# Altium PCB PCB1.PcbDoc (part 1 of 2)
Units mm, origin at the board's own origin, x right, y up, seen from the top; angles counter-clockwise.
Board outline 103.5 x 62.7 mm, 4 copper layers (Top Layer, Int1 (GND), Int2 (PWR), Bottom Layer), stack 1.369 mm thick; 71 components, 120 nets, 440 pads, 282 vias.
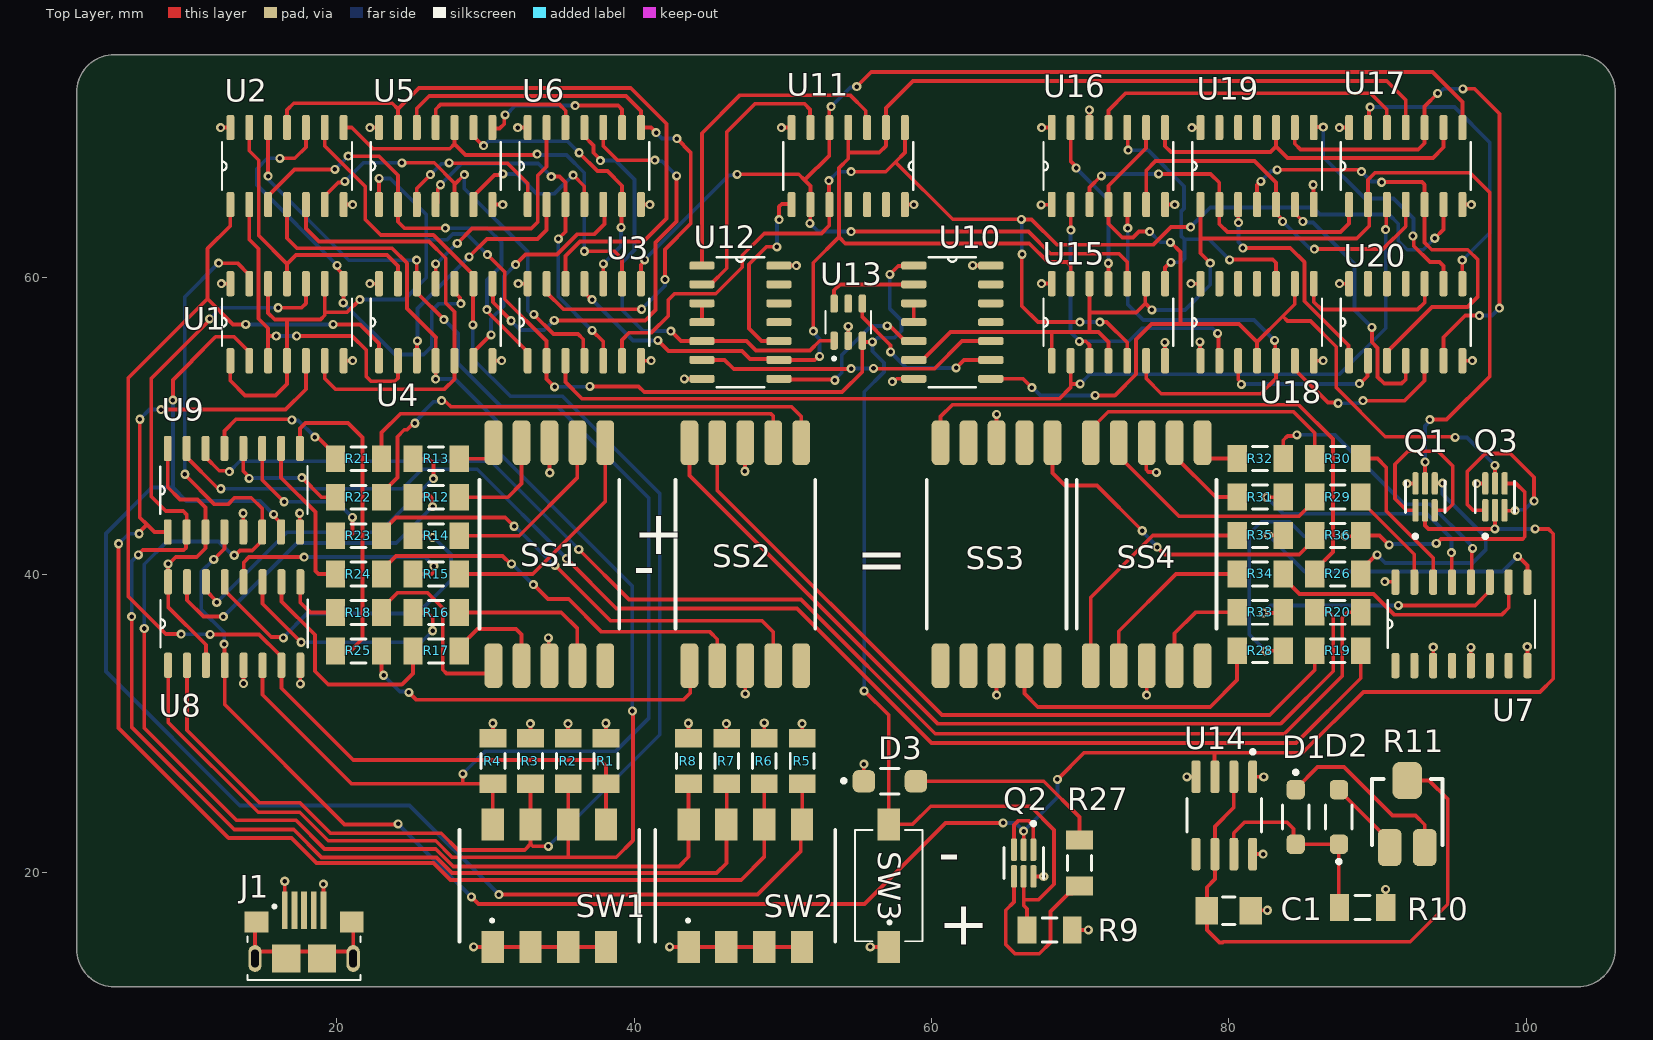
[diagram p0: Top Layer view]
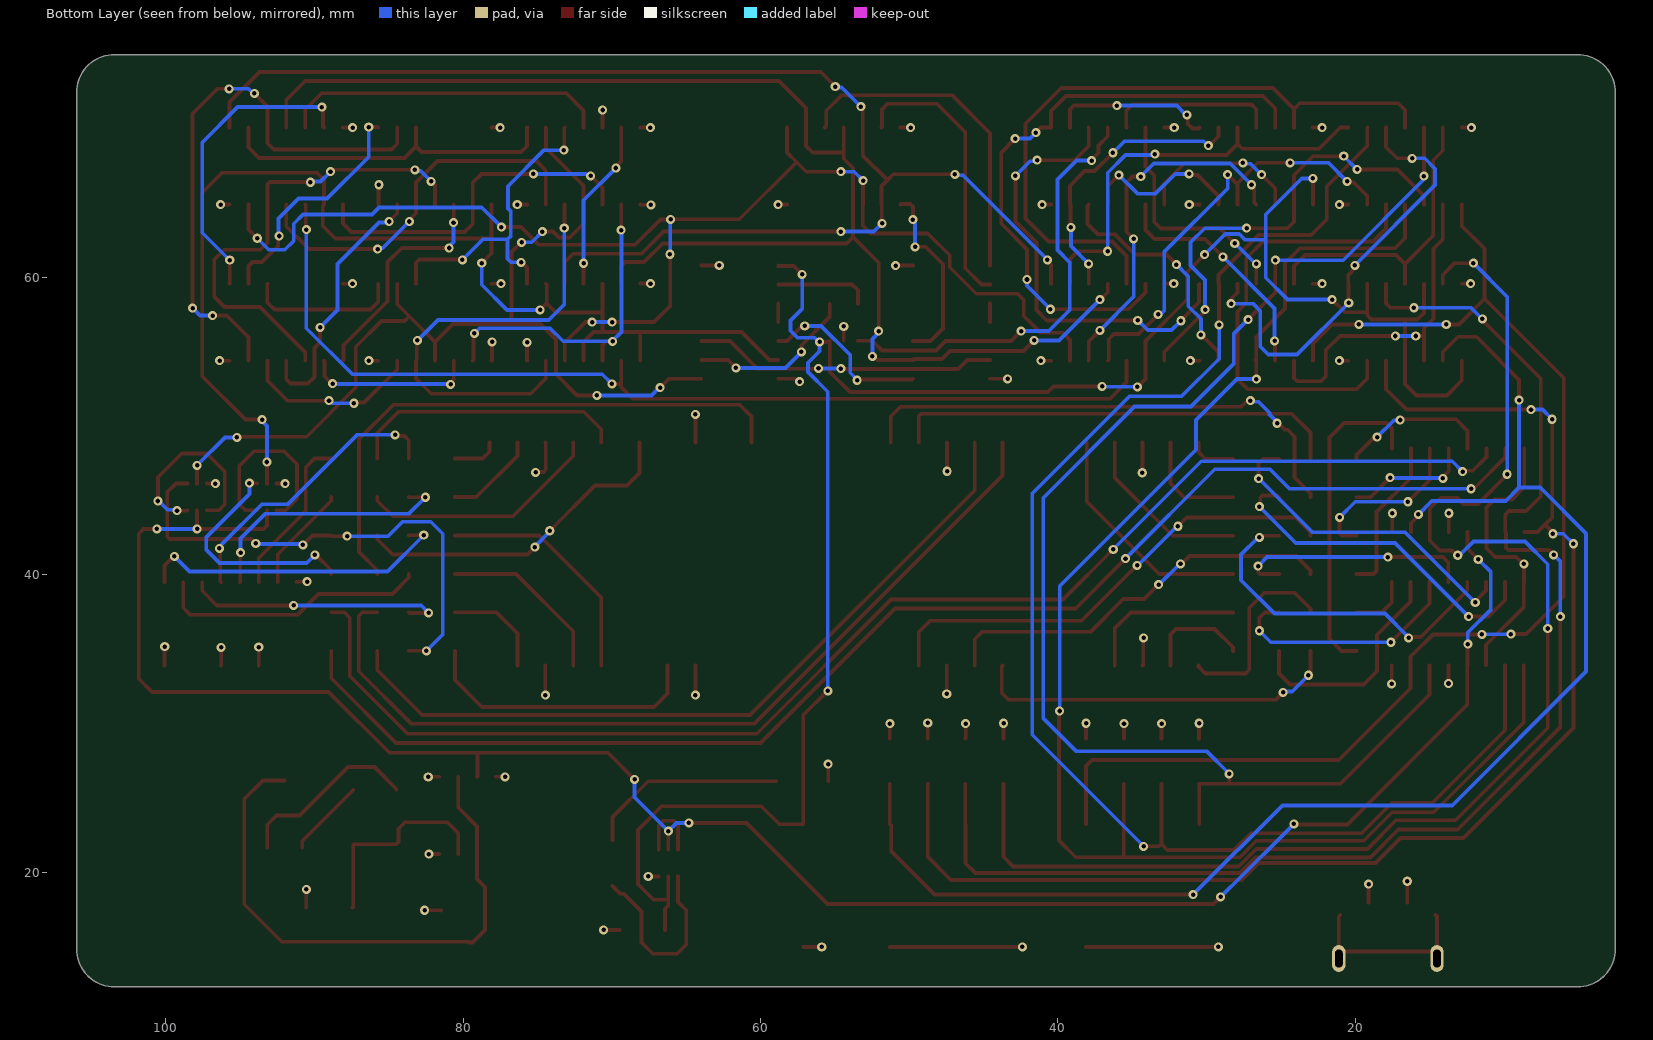
[diagram p1: Bottom Layer view, seen from below]
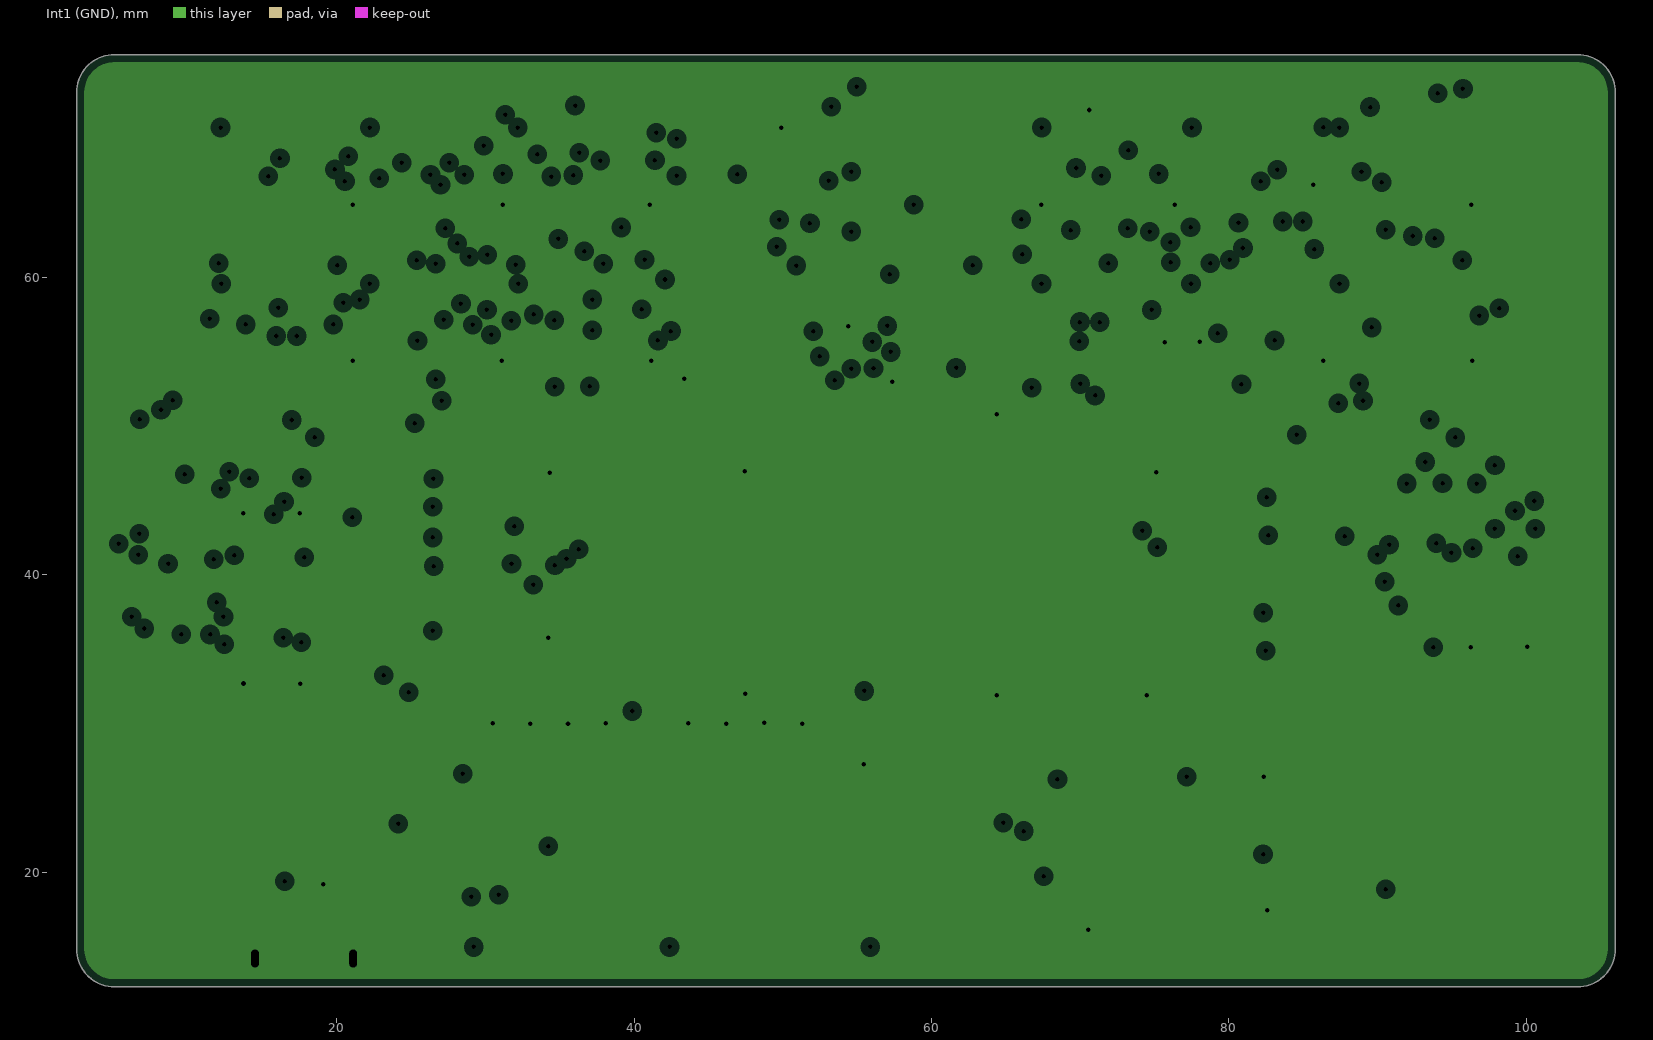
[diagram p2: Int1 (GND), clearances drawn from the general rule]
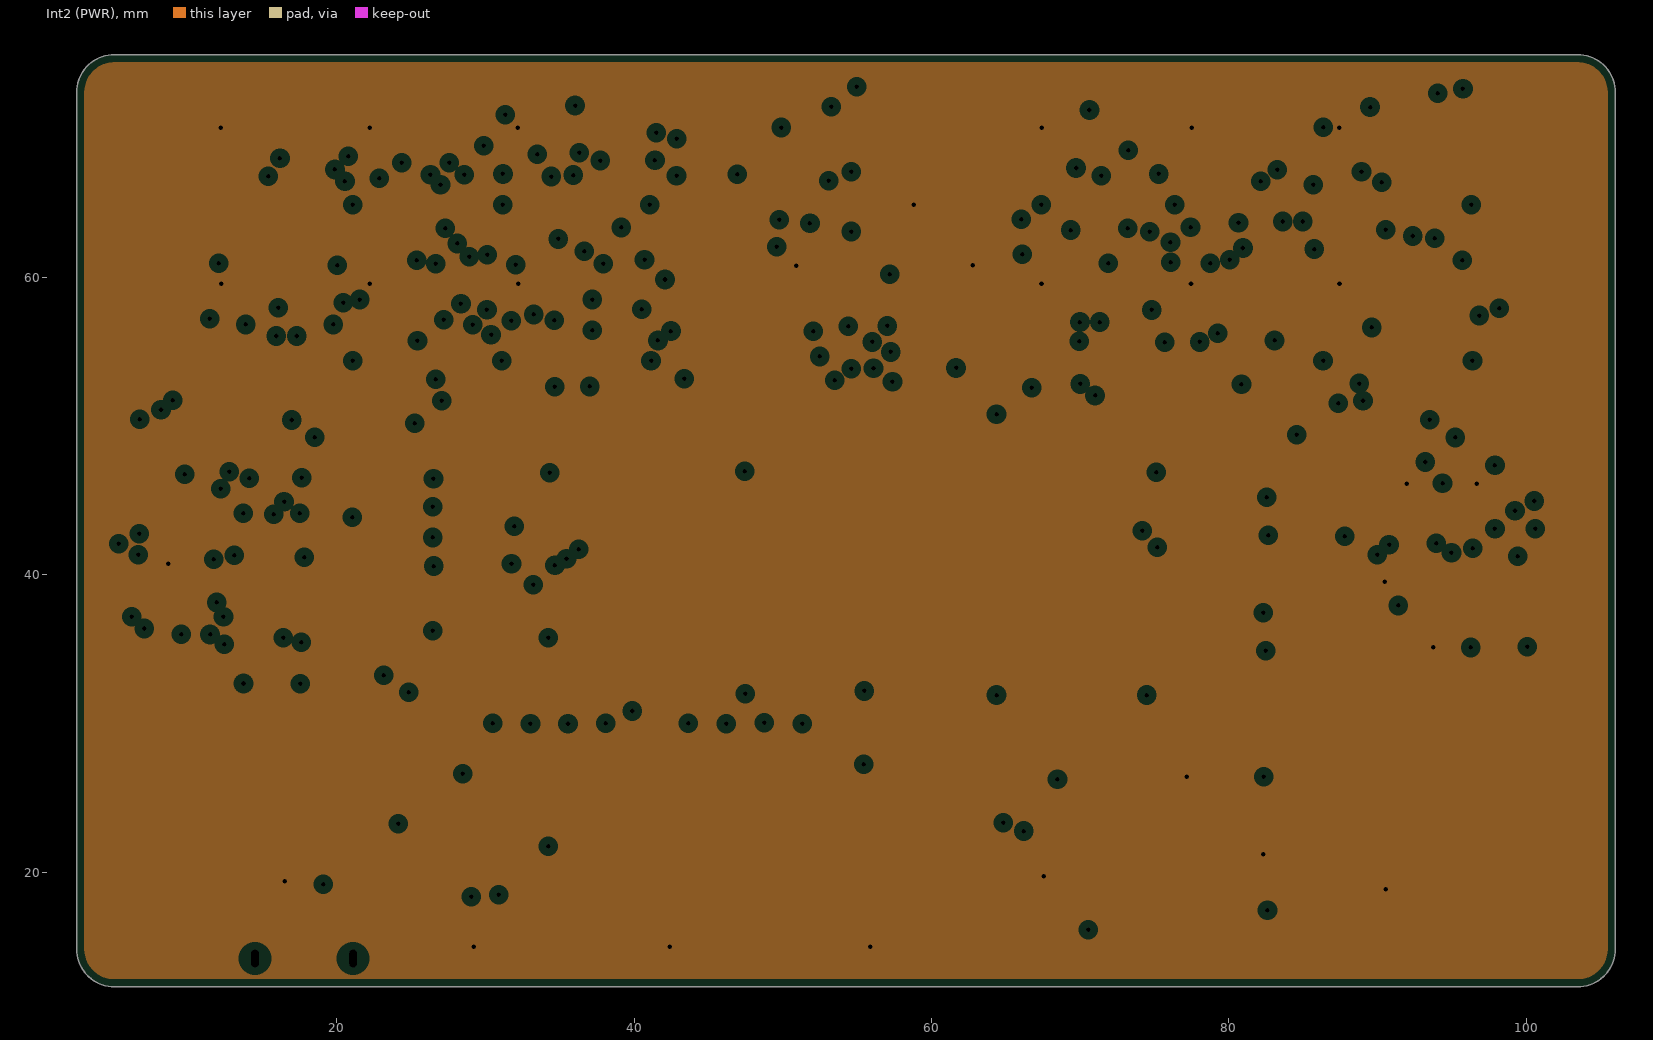
[diagram p3: Int2 (PWR), clearances drawn from the general rule]
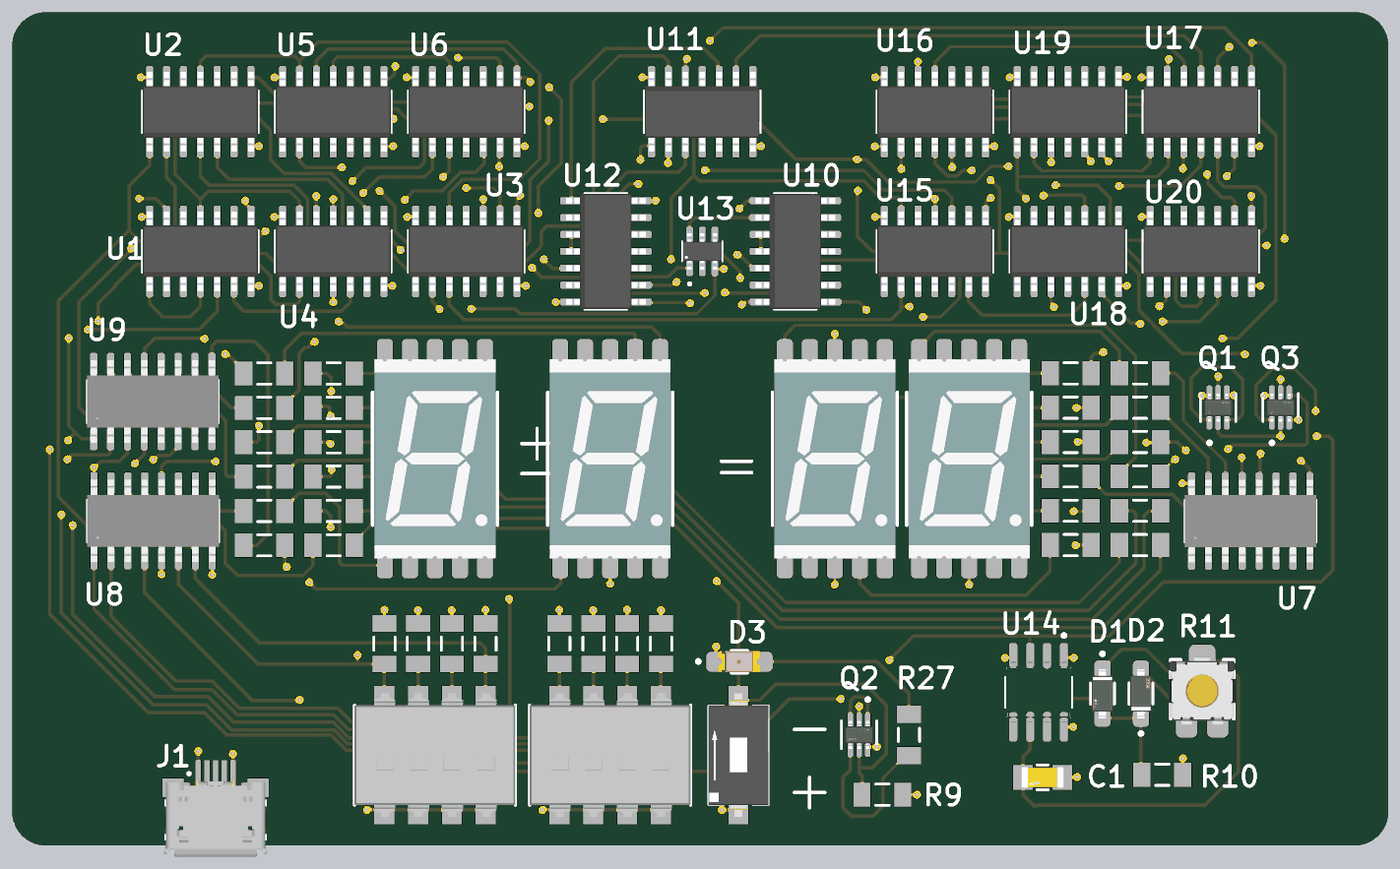
[diagram p5: 3D render of the assembled board from above, using the file's embedded part models]

## Layer stack, top to bottom
Top Solder: solder mask 0.0254, SM-001, Dk 4
Top Layer: signal copper 0.035
Dielectric 1: prepreg 0.1295, PP-017, Dk 4.3
Dielectric 2: prepreg 0.1295, PP-017, Dk 4.3
Int1 (GND): plane copper 0.035, net GND
Dielectric 3: core 0.7112, Core-039, Dk 4.8
Int2 (PWR): plane copper 0.035, net 5V
Dielectric 4: prepreg 0.1295, PP-017, Dk 4.3
Dielectric 5: prepreg 0.1295, PP-017, Dk 4.3
Bottom Layer: signal copper 0.035
Bottom Solder: solder mask 0.0254, SM-001, Dk 4

## Board outline
2.5,14.84 ccw(c5.04,14.84) 5.04,12.3 103.46,12.3 ccw(c103.46,14.84) 106,14.84 106,72.46 ccw(c103.46,72.46) 103.46,75 102.2,75 5.04,75 ccw(c5.04,72.46) 2.5,72.46

## Design rules (kind name [scope] priority, off if disabled: settings)
Clearance [All] p1: gap=0.254 ignorepadtopadclearanceinfootprint=TRUE except(0: Arc-Hole Track-Hole SMDPad-Hole THPad-Hole Via-Hole Fill-Hole Poly-Hole Region-Hole Text-Hole; 0.127: Arc-Arc Arc-Track Track-Track SMDPad-SMDPad; 0.2: Arc-SMDPad Arc-Via Track-SMDPad Track-Via SMDPad-Via)
MinimumSolderMaskSliver [All] p1: minsoldermaskwidth=0.05
PlaneClearance [All] p1: clearance=0.508
PlaneConnect [All] p1: planeconnectstyle=Direct reliefexpansion=0.508 reliefentries=4 reliefconductorwidth=0.254 reliefairgap=0.254
PolygonConnect [All] p1: connectstyle=Relief reliefconductorwidth=0.254 reliefentries=4 polygonreliefangle="90 Angle" airgapwidth=0.254
RoutingVias [All] p1: holewidth=0.305 width=0.61 viastyle="Through Hole" minholewidth=0.305 minwidth=0.61 maxholewidth=0.305 maxwidth=0.61
SolderMaskExpansion [All] p1: expansion=0.05 istentingtop=FALSE
Width [All] p1: maxlimit=0.254 minlimit=0.254 preferedwidth=0.254
27 further rules are at their usual default settings.

## Components (designator, comment, footprint, x,y, rotation, side; value= is the part's Value field where it differs from the comment)
C1 "1nF" FP-CL31-IPC_A 80,17.425 r180 top
D1 "1N4148W-TP" FP-SOD-123-MFG 84.5,23.725 r270 top
D2 "1N4148W-TP" FP-SOD-123-MFG 87.4,23.725 r90 top
D3 "LTST-C150KRKT" FP-LTST-C150KRKT-MFG 57.2,26.125 r0 top
J1 "10118193-0001LF" FCI_10118193-0001LF 17.8,14.2 r0 top
Q1 "UM6K33NTN" FP-SOT363-IPC_A 93.2,45.254 r90 top
Q2 "UM6K33NTN" FP-SOT363-IPC_A 66.2,20.625 r270 top
Q3 "UM6K33NTN" FP-SOT363-IPC_A 97.9,45.254 r90 top
R1 "10k" RESC3116X65X40ML10T20#1 38.1,27.479 r90 top
R2 "10k" RESC3116X65X40ML10T20#1 35.575,27.479 r270 top
R3 "10k" RESC3116X65X40ML10T20#1 33.025,27.479 r270 top
R4 "10k" RESC3116X65X40ML10T20#1 30.5,27.479 r270 top
R5 "10k" RESC3116X65X40ML10T20#1 51.3,27.479 r90 top
R6 "10k" RESC3116X65X40ML10T20#1 48.75,27.479 r270 top
R7 "10k" RESC3116X65X40ML10T20#1 46.225,27.479 r270 top
R8 "10k" RESC3116X65X40ML10T20#1 43.65,27.479 r270 top
R9 "10k" RESC3116X65X40ML10T20#1 67.95,16.125 r0 top
R10 "1k" RESC3116X65X40ML10T20#2 89,17.625 r0 top
R11 "1M" ST4ETA105 92,23.925 r0 top
R12 "100" RESC3116X65X40ML10T20#2 26.675,45.23 r180 top
R13 "100" RESC3116X65X40ML10T20#2 26.675,47.815 r180 top
R14 "100" RESC3116X65X40ML10T20#2 26.675,42.644 r180 top
R15 "100" RESC3116X65X40ML10T20#2 26.675,40.059 r180 top
R16 "100" RESC3116X65X40ML10T20#2 26.675,37.473 r180 top
R17 "100" RESC3116X65X40ML10T20#2 26.675,34.887 r180 top
R18 "100" RESC3116X65X40ML10T20#2 21.458,37.473 r180 top
R19 "100" RESC3116X65X40ML10T20#2 87.325,34.901 r0 top
R20 "100" RESC3116X65X40ML10T20#2 87.325,37.487 r0 top
R21 "100" RESC3116X65X40ML10T20#2 21.458,47.815 r180 top
R22 "100" RESC3116X65X40ML10T20#2 21.458,45.23 r180 top
R23 "100" RESC3116X65X40ML10T20#2 21.458,42.644 r180 top
R24 "100" RESC3116X65X40ML10T20#2 21.458,40.059 r180 top
R25 "100" RESC3116X65X40ML10T20#2 21.458,34.887 r180 top
R26 "100" RESC3116X65X40ML10T20#2 87.325,40.072 r180 top
R27 "100" RESC3116X65X40ML10T20#2 69.95,20.625 r90 top
R28 "100" RESC3116X65X40ML10T20#2 82.108,34.901 r180 top
R29 "100" RESC3116X65X40ML10T20#2 87.325,45.243 r0 top
R30 "100" RESC3116X65X40ML10T20#2 87.325,47.829 r0 top
R31 "100" RESC3116X65X40ML10T20#2 82.108,45.243 r0 top
R32 "100" RESC3116X65X40ML10T20#2 82.108,47.829 r0 top
R33 "100" RESC3116X65X40ML10T20#2 82.108,37.487 r0 top
R34 "100" RESC3116X65X40ML10T20#2 82.108,40.072 r0 top
R35 "100" RESC3116X65X40ML10T20#2 82.108,42.658 r0 top
R36 "100" RESC3116X65X40ML10T20#2 87.325,42.658 r180 top
SS1 "XZFMDK10C" XZFMDK10C 34.3,41.404 r0 top
SS2 "XZFMDK10C" XZFMDK10C 47.475,41.404 r0 top
SS3 "XZFMDK10C" XZFMDK10C 64.375,41.404 r0 top
SS4 "XZFMDK10C" XZFMDK10C 74.475,41.404 r0 top
SW1 "SW_SDA04H1SBD" SW_SDA04H1SBD 34.3,19.104 r0 top
SW2 "SW_SDA04H1SBD" SW_SDA04H1SBD 47.475,19.104 r0 top
SW3 "SW_SDA01H1SBD" SW_SDA01H1SBD 57.125,19.105 r90 top
U1 "74HC86D,653" SOIC127P600X175-14N 16.65,57.004 r90 top
U2 "74HC86D,653" SOIC127P600X175-14N 16.65,67.504 r90 top
U3 "74HC86D,653" SOIC127P600X175-14N 36.65,57.004 r90 top
U4 "74HC08D,653" SOIC127P600X175-14N 26.65,57.004 r90 top
U5 "74HC08D,653" SOIC127P600X175-14N 26.65,67.504 r90 top
U6 "SN74AC32DR" SOIC127P600X175-14N 36.65,67.504 r90 top
U7 "MC14511BDR2G" SOIC-16_ONS-M 95.65,36.711 r90 top
U8 "MC14511BDR2G" SOIC-16_ONS-M 13.1,36.729 r90 top
U9 "MC14511BDR2G" SOIC-16_ONS-M 13.075,45.704 r90 top
U10 "74HC08D,653" SOIC127P600X175-14N 61.4,57.004 r0 top
U11 "74HC08D,653" SOIC127P600X175-14N 54.4,67.504 r270 top
U12 "SN74AC32DR" SOIC127P600X175-14N 47.15,57.004 r0 top
U13 "74LVC2G04GV,125" SOT95P275X110-6N 54.4,57.004 r90 top
U14 "ICM7555CBAZ-T" FP-M8_15-MFG 79.7,23.825 r270 top
U15 "74HC86D,653" SOIC127P600X175-14N 71.9,57.004 r90 top
U16 "74HC86D,653" SOIC127P600X175-14N 71.9,67.504 r90 top
U17 "74HC86D,653" SOIC127P600X175-14N 91.9,67.504 r90 top
U18 "74HC08D,653" SOIC127P600X175-14N 81.9,57.004 r90 top
U19 "74HC08D,653" SOIC127P600X175-14N 81.9,67.504 r90 top
U20 "SN74AC32DR" SOIC127P600X175-14N 91.9,57.004 r90 top

## Footprints (in the part's own frame and the unit in brackets; to place one, negate y for a bottom-side part, rotate by r counter-clockwise, add the part's x,y. Pads: shape width x height; smd on the part's side, far side on the other; paste and mask are expansions set on the pad)
FCI_10118193-0001LF [mm]
  rect 0.4x2.5 smd mask+0.05: 1(-1.3,3.25) 2(-0.65,3.25) 3(0,3.25) 4(0.65,3.25) 5(1.3,3.25)
  rect 1.6x1.4 smd: S1(-3.2,2.45) S2(3.2,2.45)
  rect 1.9x1.9 smd: S3(1.2,0) S4(-1.2,0)
  oval 0.9x1.8 hole 0.5 slot 1.2 at 90 deg: S5(-3.3,0) S6(3.3,0)
  silkscreen extent -3.8,-1.45 3.8,3.6, body extent -3.93,-2.75 3.93,2.91, height 2.82
FP-CL31-IPC_A [mm]
  rect 1.505x1.858 smd paste+0: 1(-1.476,0) 2(1.476,0)
  silkscreen extent -0.42,-0.93 0.42,0.93, body extent -2.73,-1.43 2.73,1.43, height 0.25
FP-LTST-C150KRKT-MFG [mm]
  rrect50% 1.5x1.5 smd paste+0: 1(-1.75,0) 2(1.75,0)
  silkscreen extent -3.22,-0.85 0.63,0.85, body extent -2.6,-0.95 2.6,0.95, height 0.25
FP-M8_15-MFG [mm]
  rrect50% 2.2x0.6 smd paste+0: 1(-2.6,1.905) 2(-2.6,0.635) 3(-2.6,-0.635) 4(-2.6,-1.905) 5(2.6,-1.905) 6(2.6,-0.635) 7(2.6,0.635) 8(2.6,1.905)
  silkscreen extent -4.4,-2.5 1.12,2.5, body extent -3.8,-2.75 3.8,2.75, height 0.25
FP-SOD-123-MFG [mm]
  rrect50% 1.31x1.22 smd paste+0: 1(-1.835,0) 2(1.835,0)
  silkscreen extent -3.12,-0.9 0.8,0.9, body extent -2.19,-1 2.19,1, height 0.25
FP-SOT363-IPC_A [mm]
  rrect50% 1.51x0.412 smd paste+0: 1(-0.901,0.65) 2(-0.901,0) 3(-0.901,-0.65) 4(0.901,-0.65) 5(0.901,0) 6(0.901,0.65)
  silkscreen extent -2.78,-1.33 1.05,1.33, body extent -2.16,-1.58 2.16,1.58, height 0.25
RESC3116X65X40ML10T20#1 [mm] "Chip Resistor, 2-Leads, Body 3.10x1.60mm, IPC Low Density"
  rect 1.25x1.8 smd: 1(-1.525,0) 2(1.525,0)
  silkscreen extent -0.5,-0.8 0.5,0.8, body extent -1.6,-0.85 1.6,0.85, height 0.65
RESC3116X65X40ML10T20#2 [mm] "Chip Resistor, 2-Leads, Body 3.10x1.60mm, IPC Low Density"
  rect 1.3x1.8 smd: 1(-1.55,0) 2(1.55,0)
  silkscreen extent -0.5,-0.8 0.5,0.8, body extent -1.6,-0.85 1.6,0.85, height 0.65
SOIC127P600X175-14N [mil]
  rrect50% 67x21 smd: 1(-102,150) 2(-102,100) 3(-102,50) 4(-102,0) 5(-102,-50) 6(-102,-100) 7(-102,-150) 8(102,-150) 9(102,-100) 10(102,-50) 11(102,0) 12(102,50) 13(102,100) 14(102,150)
  silkscreen extent -63,-172 63,172, body extent -118,-170 118,170, height 69
SOIC-16_ONS-M [mil]
  rrect50% 67x21 smd: 1(-110.5,175)
  rrect50% 67x21 smd paste+0: 2(-110.5,125) 3(-110.5,75) 4(-110.5,25) 5(-110.5,-25) 6(-110.5,-75) 7(-110.5,-125) 8(-110.5,-175) 9(110.5,-175) 10(110.5,-125) 11(110.5,-75) 12(110.5,-25) 13(110.5,25) 14(110.5,75) 15(110.5,125) 16(110.5,175)
  silkscreen extent -63,-195 63,195, body extent -122,-195 122,195, height 69
SOT95P275X110-6N [mm]
  rrect50% 1.22x0.5 smd: 1(-1.245,0.95) 2(-1.245,0) 3(-1.245,-0.95) 4(1.245,-0.95) 5(1.245,0) 6(1.245,0.95)
  silkscreen extent -2.55,-1.52 0.75,1.52, body extent -1.38,-1.45 1.38,1.45, height 1.1
ST4ETA105 [mm]
  rrect50% 1.6x2.5 smd: 1(-1.175,-2.25) 3(1.175,-2.25)
  rrect50% 2x2.5 smd: 2(0,2.25)
  silkscreen extent -2.37,-2.1 2.37,2.35, body extent -2.5,-2.6 2.5,2.6, height 2.3
SW_SDA01H1SBD [mm]
  rect 2.15x1.5 smd: 1(-4.125,0) 2(4.125,0)
  silkscreen extent -3.74,-2.26 3.74,2.26, body extent -4.65,-2.26 4.65,2.26, height 5.44
SW_SDA04H1SBD [mm]
  rect 1.5x2.15 smd: 1(-3.81,-4.124) 2(-1.27,-4.124) 3(1.27,-4.124) 4(3.81,-4.124) 5(3.81,4.126) 6(1.27,4.126) 7(-1.27,4.126) 8(-3.81,4.126)
  silkscreen extent -6.05,-3.75 6.05,3.75, body extent -6.05,-4.65 6.04,4.65, height 5.5
XZFMDK10C [mm]
  rrect50% 1.2x3 smd: 1(-3.76,-7.5) 2(-1.88,-7.5) 3(0,-7.5) 4(1.88,-7.5) 5(3.76,-7.5) 6(3.76,7.5) 7(1.88,7.5) 8(0,7.5) 9(-1.88,7.5) 10(-3.76,7.5)
  silkscreen extent -4.7,-5 4.7,5, body extent -4.55,-7.5 4.55,7.5, height 3.8

## Part data
C1: library part CMP-13271-001948-1, "Cap Ceramic 1nF 50V X7R ±10% SMD 1206 +125°C Embossed T/R", Case Code (Imperial)=1206, Case Code (Metric)=3216, Dielectric=X7R, Max Operating Temperature=125°C, Min Operating Temperature=-55°C, Package Quantity=4000, Tolerance=10%, Voltage=63V, Voltage Rating=50V, Capacitance=1nF, Case/Package=1206, Depth=1.6mm, Height=0.85mm, Lead Free="Lead Free", Length=3.2mm, Material=Ceramic, Mount="Surface Mount", Packaging="Tape and Reel", Radiation Hardening=No, Thickness=0.037inch, Voltage Rating (DC)=50V, Width=0.063inch
D1 D2: library part CMP-2000-04993-2, "DIODE GEN PURP 100V 150MA SOD123", Average Rectified Current=150mA, Capacitance=4pF, Forward Voltage=1V, Max Forward Surge Current (Ifsm)=1A, Max Operating Temperature=150°C, Max Repetitive Reverse Voltage (Vrrm)=100V, Max Reverse Leakage Current=5uA, Max Surge Current=2A, Min Operating Temperature=-65°C, Package Quantity=3000, Power Dissipation=400mW, Current Rating=150mA, Element Configuration=Single, Forward Current=150mA, Height=1.2mm, Lead Free="Lead Free", Length=2.85mm, Max Reverse Voltage (DC)=100V, Mount="Surface Mount", Number of Pins=2, Output Current=150mA, Packaging="Tape and Reel", Peak Non-Repetitive Surge Current=2A, Polarity=Standard, Radiation Hardening=No, Recovery Time=4ns, Reverse Recovery Time=4ns, Voltage Rating (DC)=100V, Width=1.8mm
D3: library part CMP-2000-06617-2, "LED RED CLEAR 1206 SMD", Case Code (Imperial)=1206, Case Code (Metric)=3216, Color=Red, Forward Current=30mA, Forward Voltage=2V, Lens Color=Colorless, Max Operating Temperature=85°C, Min Operating Temperature=-30°C, Package Quantity=1, Power Dissipation=62.5mW, Power Rating=75mW, Reverse Voltage=5V, Test Current=20mA, Case/Package=1206, Depth=1.6mm, Dominant Wavelength=631nm, Height=1.1mm, Illumination Color=Red, Lead Free="Lead Free", Length=3.2mm, Lens Style=Diffused, Lens Transparency=Clear, Luminous Intensity=54mcd, Mount="Surface Mount", Number of Elements=1, Number of LEDs=1, Number of Pins=2, Packaging="Tape and Reel", Radiation Hardening=No, Viewing Angle=130°, Wavelength=639nm, Width=1.6mm
J1: "USB - micro B USB 2.0 Receptacle Connector 5 Position Surface Mount, Right Angle; Through Hole", Package=None, Availability=Unavailable, MF="Amphenol ICC", MP=10118193-0001LF, Price=None, SnapEDA_Link=https://www.snapeda.com/parts/10118193-0001LF/Amphenol%20FCI/view-part/2758989/?ref=snap
Q1 Q2 Q3: "MOSFET 2N-CH 50V 0.2A UMT6"
R1 R2 R3 R4 R5 R6 R7 R8 R9: library part CMP-1014-00623-2, Case Code (Imperial)=1206, Case Code (Metric)=3216, Manufacturer=Yageo, Max Operating Temperature=155degC, Min Operating Temperature=-55degC, Package Description="2-Pin Surface Mount Device, Body 3.1 x 1.6 mm", Package Quantity=5000, Package Reference=1206.0, Power Rating=250mW, Resistance=10KOhm, Temperature Coefficient=100ppm/degreesC, Tolerance=1%, Voltage Rating=200V, Case/Package=1206, Composition=ThickFilm, Datasheet URL=http://www.yageo.com/NewPortal/yageodocoutput?fileName=/pdf/R-Chip/PYu-RC_Group_51_RoHS_L_5.pdf, Datasheet Version="Rev. 5, 10/2016", Depth=1.6mm, Height=0.55mm, Lead Free=LeadFree, Length=3.1mm, Manufacturer URL=http://www.yageo.com/, Military Standard=Not, Packaging=TapeandReel, REACH SVHC=Unknown, RoHSCompliant=true, Termination=SMD/SMT, Width=1.6mm
R10: library part RC1206FR-071KL
R11: library part ST4ETA105, "TRIMMER 1M OHM 0.25W J LEAD TOP"
R12 R13 R14 R15 R16 R17 R18 R19 R20 R21 R22 R23 R24 R25 R26 R27 R28 R29 R30 R31 R32 R33 R34 R35 R36: library part RC1206FR-07100RL, "RES 100 OHM 1% 1/4W 1206"
SS1 SS2 SS3 SS4: "DISPLAY 7-SEG 0.4\" SGL RED 10SMD"
SW1 SW2 SW3: "SWITCH SLIDE DIP SPST"
U1 U2 U3 U15 U16 U17: "XOR 4 Channel 14-SO", Package="SOIC-14 NXP Semiconductors", Digi-Key_Part_Number=1727-2827-1-ND, Digi-Key_Purchase_URL=https://www.digikey.com/product-detail/en/nexperia-usa-inc/74HC86D,653/1727-2827-1-ND/763396?utm_source=snapeda&utm_medium=aggregator&utm_campaign=symbol, MF="Nexperia USA", MP=74HC86D,653, SnapEDA_Link=https://www.snapeda.com/parts/74HC86D%2C653/Nexperia%20USA%20Inc./view-part/462082/?ref=snap
U4 U5 U10 U11 U18 U19: "AND 4 Channel 14-SO", Package="SOIC-14 NXP Semiconductors", Digi-Key_Part_Number=1727-2827-1-ND, Digi-Key_Purchase_URL=https://www.digikey.com/product-detail/en/nexperia-usa-inc/74HC86D,653/1727-2827-1-ND/763396?utm_source=snapeda&utm_medium=aggregator&utm_campaign=symbol, MF="Nexperia USA", MP=74HC86D,653, SnapEDA_Link=https://www.snapeda.com/parts/74HC86D%2C653/Nexperia%20USA%20Inc./view-part/462082/?ref=snap
U6 U12 U20: "OR 4 Channel 14-SO", Package="SOIC-14 NXP Semiconductors", Digi-Key_Part_Number=1727-2827-1-ND, Digi-Key_Purchase_URL=https://www.digikey.com/product-detail/en/nexperia-usa-inc/74HC86D,653/1727-2827-1-ND/763396?utm_source=snapeda&utm_medium=aggregator&utm_campaign=symbol, MF="Nexperia USA", MP=74HC86D,653, SnapEDA_Link=https://www.snapeda.com/parts/74HC86D%2C653/Nexperia%20USA%20Inc./view-part/462082/?ref=snap
U7 U8 U9: "IC DRVR 7 SEGMENT 16SOIC", Mfr_Name=onsemi, Copyright="Copyright (C) 2022 Ultra Librarian. All rights reserved.", Manufacturer_Part_Number=MC14511BDR2G, RefDes=RefDes, Type=DEV
U13: "IC INVERTER 2CH 2-INP 6TSOP"
U14: library part CMP-13501-000001-1, "IC OSC SINGLE TIMER 1MHZ 8-SOIC"

## Via types
v1: diameter 0.61, hole 0.305, Top Layer to Bottom Layer, 282 vias

## Nets (pads, with @x,y where several pads share a name; then routed paths per layer and width w, separated by ;. In a path a pad name is that pad's centre, name@x,y a point inside that pad or via, vN(x,y) a via of type N, cw(c..) or ccw(c..) an arc to the next point about the centre after c; other vN are vias at no path point)
5V: J1.1 Q1.6 Q2.6 Q3.6 R10.2 SW1.1 SW1.2 SW1.3 SW1.4 SW2.1 SW2.2 SW2.3 SW2.4 SW3.1 U1.14 U2.14 U3.14 U4.14 U5.14 U6.14 U7.3 U7.16 U8.3 U8.16 U9.3 U9.16 U10.14 U11.14 U12.14 U14.4 U14.8 U15.14 U16.14 U17.14 U18.14 U19.14 U20.14 | length 56.8
  Top Layer w0.254: U9.16@8.63,48.511 8.63,45.895 9.45,45.075 10.626,45.075 11.17,44.531 U9.3@11.17,42.897 11.17,41.795 10.575,41.2 9.17,41.2 8.72,40.75 v1(8.65,40.75) 8.653,40.747 8.653,39.538 U8.16@8.655,39.536 8.655,37.845 11.195,35.305 U8.3@11.195,33.922 ; v1(12.18,70.095) U2.14@12.84,70.095 ; v1(12.23,59.595) U1.14@12.84,59.595 ; J1.1@16.5,17.95 v1(16.5,19.4) ; v1(22.22,59.595) U4.14@22.84,59.595 ; v1(22.23,70.095) U5.14@22.84,70.095 ; v1(29.205,14.98) SW1.1@30.49,14.98 SW1.2@33.03,14.98 SW1.3@35.57,14.98 SW1.4@38.11,14.98 ; v1(32.17,70.095) U6.14@32.84,70.095 ; v1(32.205,59.595) U3.14@32.84,59.595 ; v1(42.38,14.98) SW2.1@43.665,14.98 SW2.2@46.205,14.98 SW2.3@48.745,14.98 SW2.4@51.285,14.98 ; U12.14@49.741,60.814 v1(50.911,60.814) ; v1(55.88,14.98) SW3.1@57.125,14.98 ; U11.14@58.21,64.913 v1(58.813,64.913) ; v1(62.775,60.825) 62.78,60.82 63.985,60.82 U10.14@63.991,60.814 ; Q2.6@66.85,19.724 66.851,19.725 v1(67.55,19.725) ; v1(67.4,59.6) 68.085,59.6 U15.14@68.09,59.595 ; v1(67.405,70.095) U16.14@68.09,70.095 ; v1(77.175,26.425) U14.4@77.795,26.425 ; v1(77.455,59.595) U18.14@78.09,59.595 ; v1(77.52,70.095) U19.14@78.09,70.095 ; U14.8@81.605,21.225 v1(82.3,21.225) ; v1(87.43,70.095) U17.14@88.09,70.095 ; v1(87.445,59.595) U20.14@88.09,59.595 ; v1(90.5,39.55) 91.173,39.55 U7.16@91.205,39.518 ; R10.2@90.55,17.625 v1(90.55,18.85) ; v1(91.975,46.15) 92.545,46.15 Q1.6@92.55,46.155 ; U7.3@93.745,33.904 93.748,33.907 93.748,35.148 v1(93.75,35.15) ; v1(96.671,46.15) 97.245,46.15 Q3.6@97.25,46.155
a1: R14.1 SS1.7 | length 11.9
  Top Layer w0.254: R14.1@28.225,42.644 32.269,42.644 36.18,46.555 SS1.7@36.18,48.904
A1Y: U4.3 U6.2 | length 16.1
  Top Layer w0.254: U4.3@25.38,54.413 25.403,54.436 25.403,55.728 v1(25.425,55.75) ; v1(28.9,61.4) 30.1,62.6 33.501,62.6 34.11,63.209 U6.2@34.11,64.913
  Bottom Layer w0.254: v1(25.425,55.75) 25.425,57.925 v1(28.9,61.4)
A1Y1: U18.3 U20.2 | length 11.4
  Top Layer w0.254: U18.3@80.63,54.413 80.63,53.141 80.85,52.921 v1(80.85,52.825) ; v1(88.775,52.875) 88.832,52.875 89.33,53.373 89.33,54.383 U20.2@89.36,54.413
  Bottom Layer w0.254: v1(80.85,52.825) 80.875,52.85 88.75,52.85 v1(88.775,52.875)
a2: R21.1 SS2.7 | length 30.5
  Top Layer w0.254: R21.1@23.008,47.815 23.008,49.583 24.263,50.838 49.206,50.838 49.355,50.689 SS2.7@49.355,48.904
A2Y: U4.6 U6.5 | length 16.1
  Top Layer w0.254: U4.6@29.19,54.413 29.19,54.994 30.346,56.15 v1(30.375,56.15) ; v1(32.025,60.875) 32.7,61.55 34.807,61.55 36.182,62.925 37.325,62.925 38,63.6 38,64.833 U6.5@37.92,64.913
  Bottom Layer w0.254: v1(30.375,56.15) 30.375,57.232 31.225,58.082 31.225,60.075 v1(32.025,60.875)
A2Y1: U18.6 U20.5 | length 12.2
  Top Layer w0.254: U18.6@84.44,54.413 84.44,53.829 86.664,51.605 87.295,51.605 v1(87.35,51.55) ; v1(89.025,51.725) 91.825,51.725 93.17,53.07 U20.5@93.17,54.413
  Bottom Layer w0.254: v1(87.35,51.55) 88.754,51.55 88.929,51.725 v1(89.025,51.725)
A3Y: U4.8 U6.10 | length 30.2
  Top Layer w0.254: U4.8@30.46,59.595 30.5,59.555 30.5,58.344 31.725,57.119 v1(31.725,57.1) ; v1(34.625,57.125) 40.75,57.125 41.443,57.818 41.443,62.368 42.85,63.775 v1(42.85,66.85) ; U6.10@37.92,70.095 37.92,68.855 38.875,67.9 v1(41.4,67.9)
  Bottom Layer w0.254: v1(31.725,57.1) 32.35,56.475 33.95,56.475 34.6,57.125 v1(34.625,57.125) ; v1(41.4,67.9) 41.468,67.832 41.868,67.832 v1(42.85,66.85)
A3Y1: U18.8 U20.10 | length 10.4
  Top Layer w0.254: U18.8@85.71,59.595 85.71,58.365 86.225,57.85 92.7,57.85 93.175,58.325 93.175,59.59 U20.10@93.17,59.595
a4: R31.1 SS4.7 | length 6.2
  Top Layer w0.254: SS4.7@76.355,48.904 76.355,48.004 79.116,45.243 R31.1@80.558,45.243
A4Y: U4.11 U6.13 | length 16
  Top Layer w0.254: U4.11@26.65,59.595 v1(26.65,60.925) ; v1(28.1,62.3) 29.1,63.3 33.075,63.3 33.516,63.741 33.516,66.866 34.11,67.46 U6.13@34.11,70.095
  Bottom Layer w0.254: v1(26.65,60.925) 26.688,60.925 28.063,62.3 v1(28.1,62.3)
B: Q3.5 U10.8 U16.4 U16.9 U18.4 U18.9 | length 68.1
  Top Layer w0.254: U10.8@63.991,53.194 66.156,53.194 v1(66.75,52.6) ; v1(71,52.075) 72.334,52.075 73.764,53.505 73.764,55.839 74.807,56.882 76.748,56.882 ; U16.9@74.44,70.095 74.432,70.087 74.432,68.707 71.9,66.175 U16.4@71.9,64.913 71.9,63.625 72.832,62.693 73.558,62.693 73.959,63.094 v1(74.675,63.094) ; v1(76.075,62.375) 76.096,62.375 76.748,61.723 76.748,56.882 ; U18.4@81.9,54.413 81.9,55.675 ; U18.9@84.44,59.595 84.44,58.215 83.622,57.397 ; v1(95.225,49.25) 95.175,49.3 90.525,49.3 87.225,52.6 87.225,55.35 85.5,57.075 83.945,57.075 83.622,57.397 ; Q3.5@97.9,46.155 v1(97.9,47.375) ; 76.748,56.882 80.693,56.882 81.9,55.675 ; 81.9,55.675 83.622,57.397
  Bottom Layer w0.254: v1(66.75,52.6) 66.806,52.6 67.331,52.075 v1(71,52.075) ; v1(74.675,63.094) 75.389,62.38 76.07,62.38 v1(76.075,62.375) ; v1(95.225,49.25) 96.025,49.25 v1(97.9,47.375)
B1: R15.1 SS1.6 | length 15.8
  Top Layer w0.254: R15.1@28.225,40.059 33.184,40.059 38.06,44.935 SS1.6@38.06,48.904
B2: R22.1 SS2.6 | length 35
  Top Layer w0.254: R22.1@23.008,45.23 23.008,45.48 24.075,46.547 24.075,49.3 24.541,49.766 24.72,49.766 25.16,50.206 v1(25.25,50.206) ; v1(27.05,51.725) 27.118,51.657 27.333,51.657 27.678,51.312 50.588,51.312 51.235,50.665 SS2.6@51.235,48.904
  Bottom Layer w0.254: v1(25.25,50.206) 25.25,50.285 25.767,50.802 25.767,50.917 26.507,51.657 26.982,51.657 v1(27.05,51.725)
B3: R36.2 SS3.6 | length 22.7
  Top Layer w0.254: SS3.6@68.135,48.904 68.135,46.865 68.975,46.025 71.125,46.025 v1(74.175,42.975) ; v1(75.175,41.875) 75.675,41.375 84.742,41.375 85.775,42.408 R36.2@85.775,42.658
  Bottom Layer w0.254: v1(74.175,42.975) 74.175,42.925 75.175,41.925 v1(75.175,41.875)
b4: R32.1 SS4.6 | length 3.1
  Top Layer w0.254: SS4.6@78.235,48.904 78.235,48.289 78.695,47.829 R32.1@80.558,47.829
C: U10.10 U12.6 | length 20.5
  Top Layer w0.254: U12.6@44.559,54.464 46.086,54.464 46.7,53.85 54.575,53.85 v1(54.6,53.875) ; v1(56.1,53.9) 56.13,53.87 60.195,53.87 62.059,55.734 U10.10@63.991,55.734
  Bottom Layer w0.254: v1(54.6,53.875) 54.612,53.887 56.088,53.887 v1(56.1,53.9)
c1: R16.1 SS1.4 | length 10.9
  Top Layer w0.254: R16.1@28.225,37.473 35.102,37.473 36.18,36.395 SS1.4@36.18,33.904
c2: R23.1 SS2.4 | length 32.5
  Top Layer w0.254: R23.1@23.008,42.644 23.008,42.894 23.985,43.871 31.33,43.871 v1(31.925,43.276) ; v1(34.675,40.65) 38.4,36.925 48.6,36.925 49.355,36.17 SS2.4@49.355,33.904
  Bottom Layer w0.254: v1(31.925,43.276) 31.987,43.276 34.613,40.65 v1(34.675,40.65)
c3: R28.2 SS3.4 | length 19.3
  Top Layer w0.254: SS3.4@66.255,33.904 66.255,32.02 67.15,31.125 78.75,31.125 80.558,32.933 R28.2@80.558,34.901
c4: R33.1 SS4.4 | length 7
  Top Layer w0.254: SS4.4@76.355,33.904 76.355,36.08 77.762,37.487 R33.1@80.558,37.487
d1: R17.1 SS1.2 | length 7.2
  Top Layer w0.254: R17.1@28.225,34.887 28.225,35.137 29.463,36.375 32.05,36.375 32.42,36.005 SS1.2@32.42,33.904
d2: R24.1 SS2.2 | length 27.3
  Top Layer w0.254: R24.1@23.008,40.059 23.008,40.309 23.985,41.286 31.139,41.286 31.675,40.75 v1(31.75,40.75) ; v1(33.225,39.35) 34.2,38.375 35.6,38.375 37.8,36.175 45.1,36.175 45.595,35.68 SS2.2@45.595,33.904
  Bottom Layer w0.254: v1(31.75,40.75) 31.788,40.75 33.188,39.35 v1(33.225,39.35)
d4: R34.1 SS4.2 | length 11.9
  Top Layer w0.254: SS4.2@72.595,33.904 72.595,36.22 76.447,40.072 R34.1@80.558,40.072
e1: R18.1 SS1.1 | length 13.2
  Top Layer w0.254: R18.1@23.008,37.473 23.008,37.723 24.085,38.8 26.1,38.8 27.125,37.775 27.125,33.625 27.375,33.375 30.08,33.375 30.54,33.835 SS1.1@30.54,33.904
e2: R25.1 SS2.1 | length 25
  Top Layer w0.254: R25.1@23.008,34.887 23.008,33.495 23.15,33.353 v1(23.15,33.257) ; v1(24.85,32.1) 25.35,31.6 43.3,31.6 43.77,32.07 43.77,33.849 SS2.1@43.715,33.904
  Bottom Layer w0.254: v1(23.15,33.257) 24.239,32.168 24.782,32.168 v1(24.85,32.1)
e4: R35.1 SS4.1 | length 16.2
  Top Layer w0.254: SS4.1@70.715,33.904 70.715,38.49 74.883,42.658 R35.1@80.558,42.658
f1: R12.1 SS1.9 | length 7.3
  Top Layer w0.254: R12.1@28.225,45.23 31.505,45.23 32.42,46.145 SS1.9@32.42,48.904
f2: R19.1 SS2.9 | length 52.2
  Top Layer w0.254: SS2.9@45.595,48.904 45.595,45.68 60.7,30.575 82.75,30.575 85.775,33.6 R19.1@85.775,34.901
f4: R29.1 SS4.9 | length 16.4
  Top Layer w0.254: SS4.9@72.595,48.904 72.595,48.004 76.654,43.945 84.727,43.945 85.775,44.993 R29.1@85.775,45.243
g1: R13.1 SS1.10 | length 3.1
  Top Layer w0.254: R13.1@28.225,47.815 30.08,47.815 30.54,48.275 SS1.10@30.54,48.904
g2: R20.1 SS2.10 | length 59
  Top Layer w0.254: SS2.10@43.715,48.904 43.715,46.689 60.404,30 83.5,30 87.025,33.525 87.025,37.25 86.788,37.487 R20.1@85.775,37.487
g3: R26.2 SS3.10 | length 39
  Top Layer w0.254: SS3.10@60.615,48.904 60.615,50.665 61.393,51.443 84.707,51.443 87,49.15 87,41.547 85.775,40.322 R26.2@85.775,40.072
g4: R30.1 SS4.10 | length 18.8
  Top Layer w0.254: SS4.10@70.715,48.904 70.715,49.804 71.886,50.975 84.35,50.975 85.775,49.55 R30.1@85.775,47.829
GND: C1.1 D3.1 J1.5 J1.S1 J1.S2 J1.S3 J1.S4 J1.S5 J1.S6 R1.2 R2.1 R3.1 R4.1 R5.2 R6.1 R7.1 R8.1 R9.2 SS1.3 SS1.8 SS2.3 SS2.8 SS3.3 SS3.8 SS4.3 SS4.8 U1.7 U2.7 U3.7 U4.7 U5.7 U6.7 U7.5 U7.8 U8.5 U8.8 U9.5 U9.8 U10.7 U11.7 U12.7 U13.2 U14.1 U15.7 U16.1 U16.7 U16.12 U17.7 U18.1 U18.7 U19.7 U20.7 | length 65.2
  Top Layer w0.254: v1(13.7,44.15) 13.705,44.145 13.705,42.902 U9.5@13.71,42.897 ; v1(13.725,32.7) 13.73,32.705 13.73,33.917 U8.5@13.735,33.922 ; J1.S1@14.6,17.125 14.5,17.025 14.5,14.675 16.6,14.675 19,14.675 21.1,14.675 21.1,17.025 J1.S2@21,17.125 ; v1(17.5,44.15) 17.51,44.14 17.51,42.907 U9.8@17.52,42.897 ; U8.8@17.545,33.922 17.548,33.92 17.548,32.677 v1(17.55,32.675) ; J1.5@19.1,17.975 v1(19.1,19.2) ; U1.7@20.46,54.413 v1(21.063,54.413) ; U2.7@20.46,64.913 v1(21.063,64.913) ; U4.7@30.46,54.413 v1(31.088,54.413) ; U5.7@30.46,64.913 v1(31.163,64.913) ; R4.1@30.5,29.004 v1(30.5,30.025) ; R3.1@33.025,29.004 v1(33.025,30) ; v1(34.225,35.775) 34.262,35.738 34.262,33.942 SS1.3@34.3,33.904 ; SS1.8@34.3,48.904 34.313,48.892 34.313,46.887 v1(34.325,46.875) ; v1(35.55,30) 35.55,29.029 R2.1@35.575,29.004 ; R1.2@38.1,29.004 v1(38.1,30.025) ; U3.7@40.46,54.413 v1(41.137,54.413) ; U6.7@40.46,64.913 v1(41.062,64.913) ; v1(43.381,53.194) U12.7@44.559,53.194 ; R8.1@43.65,29.004 v1(43.65,30.025) ; v1(46.2,30) 46.2,29.029 R7.1@46.225,29.004 ; v1(47.45,46.975) 47.462,46.987 47.462,48.892 SS2.8@47.475,48.904 ; v1(47.475,32) SS2.3@47.475,33.904 ; R6.1@48.75,29.004 v1(48.75,30.05) ; v1(49.905,70.095) U11.7@50.59,70.095 ; R5.2@51.3,29.004 v1(51.3,30) ; U13.2@54.4,55.759 v1(54.4,56.725) ; D3.1@55.45,26.125 v1(55.45,27.275) ; v1(57.375,53) 57.471,53 57.665,53.194 U10.7@58.809,53.194 ; v1(64.375,31.925) SS3.3@64.375,33.904 ; SS3.8@64.375,48.904 v1(64.375,50.8) ; v1(67.375,64.9) 68.077,64.9 U16.1@68.09,64.913 ; R9.2@69.475,16.125 v1(70.55,16.125) ; v1(70.625,71.275) 70.627,71.273 70.627,70.097 U16.12@70.63,70.095 ; v1(74.475,31.925) SS4.3@74.475,33.904 ; SS4.8@74.475,48.904 74.45,48.879 74.45,47.079 74.599,46.93 75.095,46.93 v1(75.125,46.9) ; v1(75.7,55.65) 75.705,55.645 75.705,54.418 U15.7@75.71,54.413 ; U16.7@75.71,64.913 v1(76.362,64.913) ; v1(78.05,55.675) 78.07,55.655 78.07,54.433 U18.1@78.09,54.413 ; C1.1@81.476,17.425 81.501,17.45 v1(82.6,17.45) ; U14.1@81.605,26.425 v1(82.35,26.425) ; v1(85.675,66.25) 85.693,66.232 85.693,64.931 U19.7@85.71,64.913 ; U18.7@85.71,54.413 v1(86.337,54.413) ; U20.7@95.71,54.413 v1(96.387,54.413) ; U17.7@95.71,64.913 v1(96.312,64.913) ; v1(96.275,35.125) 96.28,35.12 96.28,33.909 U7.5@96.285,33.904 ; v1(100.075,35.175) 100.085,35.165 100.085,33.914 U7.8@100.095,33.904
K: U6.11 U12.5 U13.1 | length 30.3
  Top Layer w0.254: U6.11@36.65,70.095 36.65,69.511 37.275,68.886 37.275,68.395 37.725,67.945 v1(37.725,67.875) ; v1(42.475,56.407) 43.148,55.734 U12.5@44.559,55.734 47.566,55.734 48.2,55.1 51.825,55.1 52.484,55.759 U13.1@53.45,55.759
  Bottom Layer w0.254: v1(37.725,67.875) 38.75,67.875 40.025,66.6 40.025,61.85 39.2,61.025 39.2,57.825 40.618,56.407 v1(42.475,56.407)
MAN: Q2.5 R9.1 SW3.2 U1.1 U1.4 U1.9 U1.12 U3.2 U5.1 U10.1 U13.3 | length 140.6
  Top Layer w0.254: U1.1@12.84,54.413 12.84,53.06 13.825,52.075 15.875,52.075 16.65,52.85 U1.4@16.65,54.413 16.65,57.175 ; U1.12@15.38,59.595 15.38,57.62 15.825,57.175 16.65,57.175 ; U1.9@19.19,59.595 19.19,57.671 ; v1(21.55,58.525) 20.696,57.671 19.19,57.671 ; U5.1@22.84,64.913 22.845,64.918 22.845,66.67 v1(22.85,66.675) ; v1(30.125,61.55) 31.3,60.375 31.3,58.55 34.11,55.74 U3.2@34.11,54.413 34.11,53.19 v1(34.65,52.65) ; v1(37.025,52.682) 40.301,52.682 40.675,52.308 53.983,52.308 55.35,53.675 U13.3@55.35,55.759 55.434,55.675 v1(56.025,55.675) ; v1(55.475,32.2) 55.5,32.2 57.125,30.575 SW3.2@57.125,23.23 58.73,23.23 59.95,24.45 66.65,24.45 68.25,22.85 68.25,19.2 67.204,18.154 66.2,18.154 ; v1(57.2,60.225) 57.764,60.789 58.784,60.789 U10.1@58.809,60.814 ; Q2.5@66.2,19.724 66.2,18.154 ; R9.1@66.425,16.125 66.425,17.55 66.2,17.775 66.2,18.154 ; 16.65,57.175 18.9,57.175 19.19,57.465 19.19,57.671
  Bottom Layer w0.254: v1(21.55,58.525) 24.55,58.525 26.018,59.993 26.018,62.544 ; v1(22.85,66.675) 23.6,66.675 26.018,64.257 26.018,62.544 ; v1(30.125,61.55) 28.743,62.932 27.8,62.932 27.413,62.544 26.018,62.544 ; v1(34.65,52.65) 34.666,52.666 37.009,52.666 v1(37.025,52.682) ; v1(55.475,32.2) 55.475,52.325 56.8,53.65 56.8,54.275 56.025,55.05 v1(56.025,55.675) 56.077,55.675 56.352,55.95 57.5,55.95 57.975,56.425 57.975,57.125 57.2,57.9 v1(57.2,60.225)
NetC1_2: C1.2 R11.2 U14.2 U14.6 | length 39
  Top Layer w0.254: U14.2@80.335,26.425 80.335,24.36 79.065,23.09 U14.6@79.065,21.225 79.065,19.54 78.524,18.999 C1.2@78.524,17.425 78.524,16.126 79.37,15.28 79.58,15.28 79.625,15.325 92.2,15.325 94.725,17.85 94.725,24.925 93.475,26.175 R11.2@92,26.175
NetD1_1: D1.1 R11.3 | length 12.5
  Top Layer w0.254: D1.1@84.5,25.56 84.5,25.605 85.97,27.075 87.75,27.075 91,23.825 92.55,23.825 93.175,23.2 R11.3@93.175,21.675
NetD1_2: D1.2 D2.1 R10.1 U14.7 | length 14.2
  Top Layer w0.254: U14.7@80.335,21.225 80.335,22.635 81.075,23.375 83.9,23.375 84.349,22.926 84.349,22.041 D1.2@84.5,21.89 D2.1@87.4,21.89 87.4,17.675 R10.1@87.45,17.625
NetD2_2: D2.2 R11.1 | length 5.3
  Top Layer w0.254: D2.2@87.4,25.56 87.4,25.533 90.825,22.107 R11.1@90.825,21.675
NetD3_2: D3.2 R27.2 | length 13.5
  Top Layer w0.254: D3.2@58.95,26.125 67.55,26.125 69.95,23.725 R27.2@69.95,22.175
NetQ1_1: Q1.1 Q1.3 | length 12.6
  Top Layer w0.254: Q1.1@92.55,44.353 91.947,44.353 91.175,45.125 91.175,47.45 92.05,48.325 94.075,48.325 95.061,47.339 95.061,44.761 94.65,44.35 93.853,44.35 Q1.3@93.85,44.353
NetQ1_4: Q1.4 R26.1 | length 15.9
  Top Layer w0.254: R26.1@88.875,40.072 88.875,40.322 89.903,41.35 v1(89.975,41.35) ; Q1.4@93.85,46.155 93.87,46.175 v1(94.375,46.175)
  Bottom Layer w0.254: v1(89.975,41.35) 90.525,40.8 96.4,40.8 97.275,41.675 97.275,42.55 94.375,45.45 v1(94.375,46.175)
NetQ2_1: Q2.1 Q2.3 | length 4.8
  Top Layer w0.254: Q2.3@65.55,21.526 65.55,23.175 65.85,23.475 66.525,23.475 66.85,23.15 Q2.1@66.85,21.526
NetQ2_4: Q2.4 R27.1 | length 13.1
  Top Layer w0.254: Q2.4@65.55,19.724 65.55,18 65,17.45 65,15.15 65.625,14.525 67.25,14.525 68,15.275 68,17.375 69.177,18.552 69.427,18.552 R27.1@69.95,19.075
NetQ3_1: Q3.1 Q3.3 | length 13.1
  Top Layer w0.254: Q3.1@97.25,44.353 96.422,44.353 96.039,44.736 96.039,46.964 97.25,48.175 98.925,48.175 100.525,46.575 100.525,44.982 v1(100.532,44.975) ; Q3.3@98.55,44.353 98.578,44.325 v1(99.25,44.325)
  Bottom Layer w0.254: v1(99.25,44.325) 99.318,44.393 99.893,44.393 100.475,44.975 v1(100.532,44.975)
NetQ3_4: Q3.4 R28.1 R36.1 | length 33.9
  Top Layer w0.254: v1(82.475,34.9) 83.657,34.9 R28.1@83.658,34.901 ; v1(87.801,42.612) 88.83,42.612 R36.1@88.875,42.658 90.142,42.658 v1(90.775,42.025) ; v1(93.95,42.125) 93.977,42.125 94.277,42.425 99.751,42.425 99.9,42.574 99.9,45.575 99.32,46.155 Q3.4@98.55,46.155
  Bottom Layer w0.254: v1(82.475,34.9) 81.375,36 81.375,42.775 82.175,43.575 84.075,43.575 85.038,42.612 v1(87.801,42.612) ; v1(90.775,42.025) 90.825,42.075 93.9,42.075 v1(93.95,42.125)
NetR12_2: R12.2 U8.15 | length 23.3
  Top Layer w0.254: U8.15@9.925,39.536 9.925,38.3 11.025,37.2 v1(12.375,37.2) ; R12.2@25.125,45.23 25.245,45.35 26.233,45.35 26.382,45.201 26.382,44.668 v1(26.45,44.6)
  Bottom Layer w0.254: v1(12.375,37.2) 17.325,42.15 24,42.15 v1(26.45,44.6)
NetR13_2: R13.2 U8.14 | length 22.2
  Top Layer w0.254: U8.14@11.195,39.536 11.195,38.948 11.925,38.218 v1(11.925,38.15) ; R13.2@25.125,47.815 26.185,47.815 26.5,47.5 v1(26.5,46.475)
  Bottom Layer w0.254: v1(11.925,38.15) 16.65,42.875 22.875,42.875 26.475,46.475 v1(26.5,46.475)
NetR14_2: R14.2 U8.13 | length 23.5
  Top Layer w0.254: U8.13@12.465,39.536 12.465,38.952 15.587,35.829 16.346,35.829 v1(16.4,35.775) ; R14.2@25.125,42.644 26.235,42.644 26.354,42.525 v1(26.45,42.525)
  Bottom Layer w0.254: v1(16.4,35.775) 16.4,35.8 18,37.4 25.425,37.4 27.675,39.65 27.675,41.376 26.526,42.525 v1(26.45,42.525)
NetR15_2: R15.2 U8.12 | length 16.3
  Top Layer w0.254: U8.12@13.735,39.536 13.735,40.835 14.1,41.2 v1(17.8,41.2) ; R15.2@25.125,40.059 26.376,40.059 26.525,40.207 v1(26.525,40.6)
  Bottom Layer w0.254: v1(17.8,41.2) 25.925,41.2 v1(26.525,40.6)
NetR16_2: R16.2 U8.11 | length 16.6
  Top Layer w0.254: U8.11@15.005,39.536 15.005,38.07 v1(17.6,35.475) ; R16.2@25.125,37.473 26.089,37.473 26.45,37.112 v1(26.45,36.25)
  Bottom Layer w0.254: v1(17.6,35.475) 25.675,35.475 v1(26.45,36.25)
NetR17_2: R17.2 U8.10 | length 15.7
  Top Layer w0.254: U8.10@16.275,39.536 16.275,38.225 18.525,35.975 18.525,33.525 19.425,32.625 24.375,32.625 25.125,33.375 R17.2@25.125,34.887
NetR18_2: R18.2 U8.9 | length 4
  Top Layer w0.254: U8.9@17.545,39.536 17.545,38.155 18.227,37.473 R18.2@19.908,37.473